# Altium PCB PCB1.PcbDoc
Units mil, origin at the board's own origin, x right, y up, seen from the top; angles counter-clockwise.
Board outline 6000 x 4000 mil, 2 copper layers (Top Layer, Bottom Layer); 40 components, 16 nets, 106 pads, 8 vias.
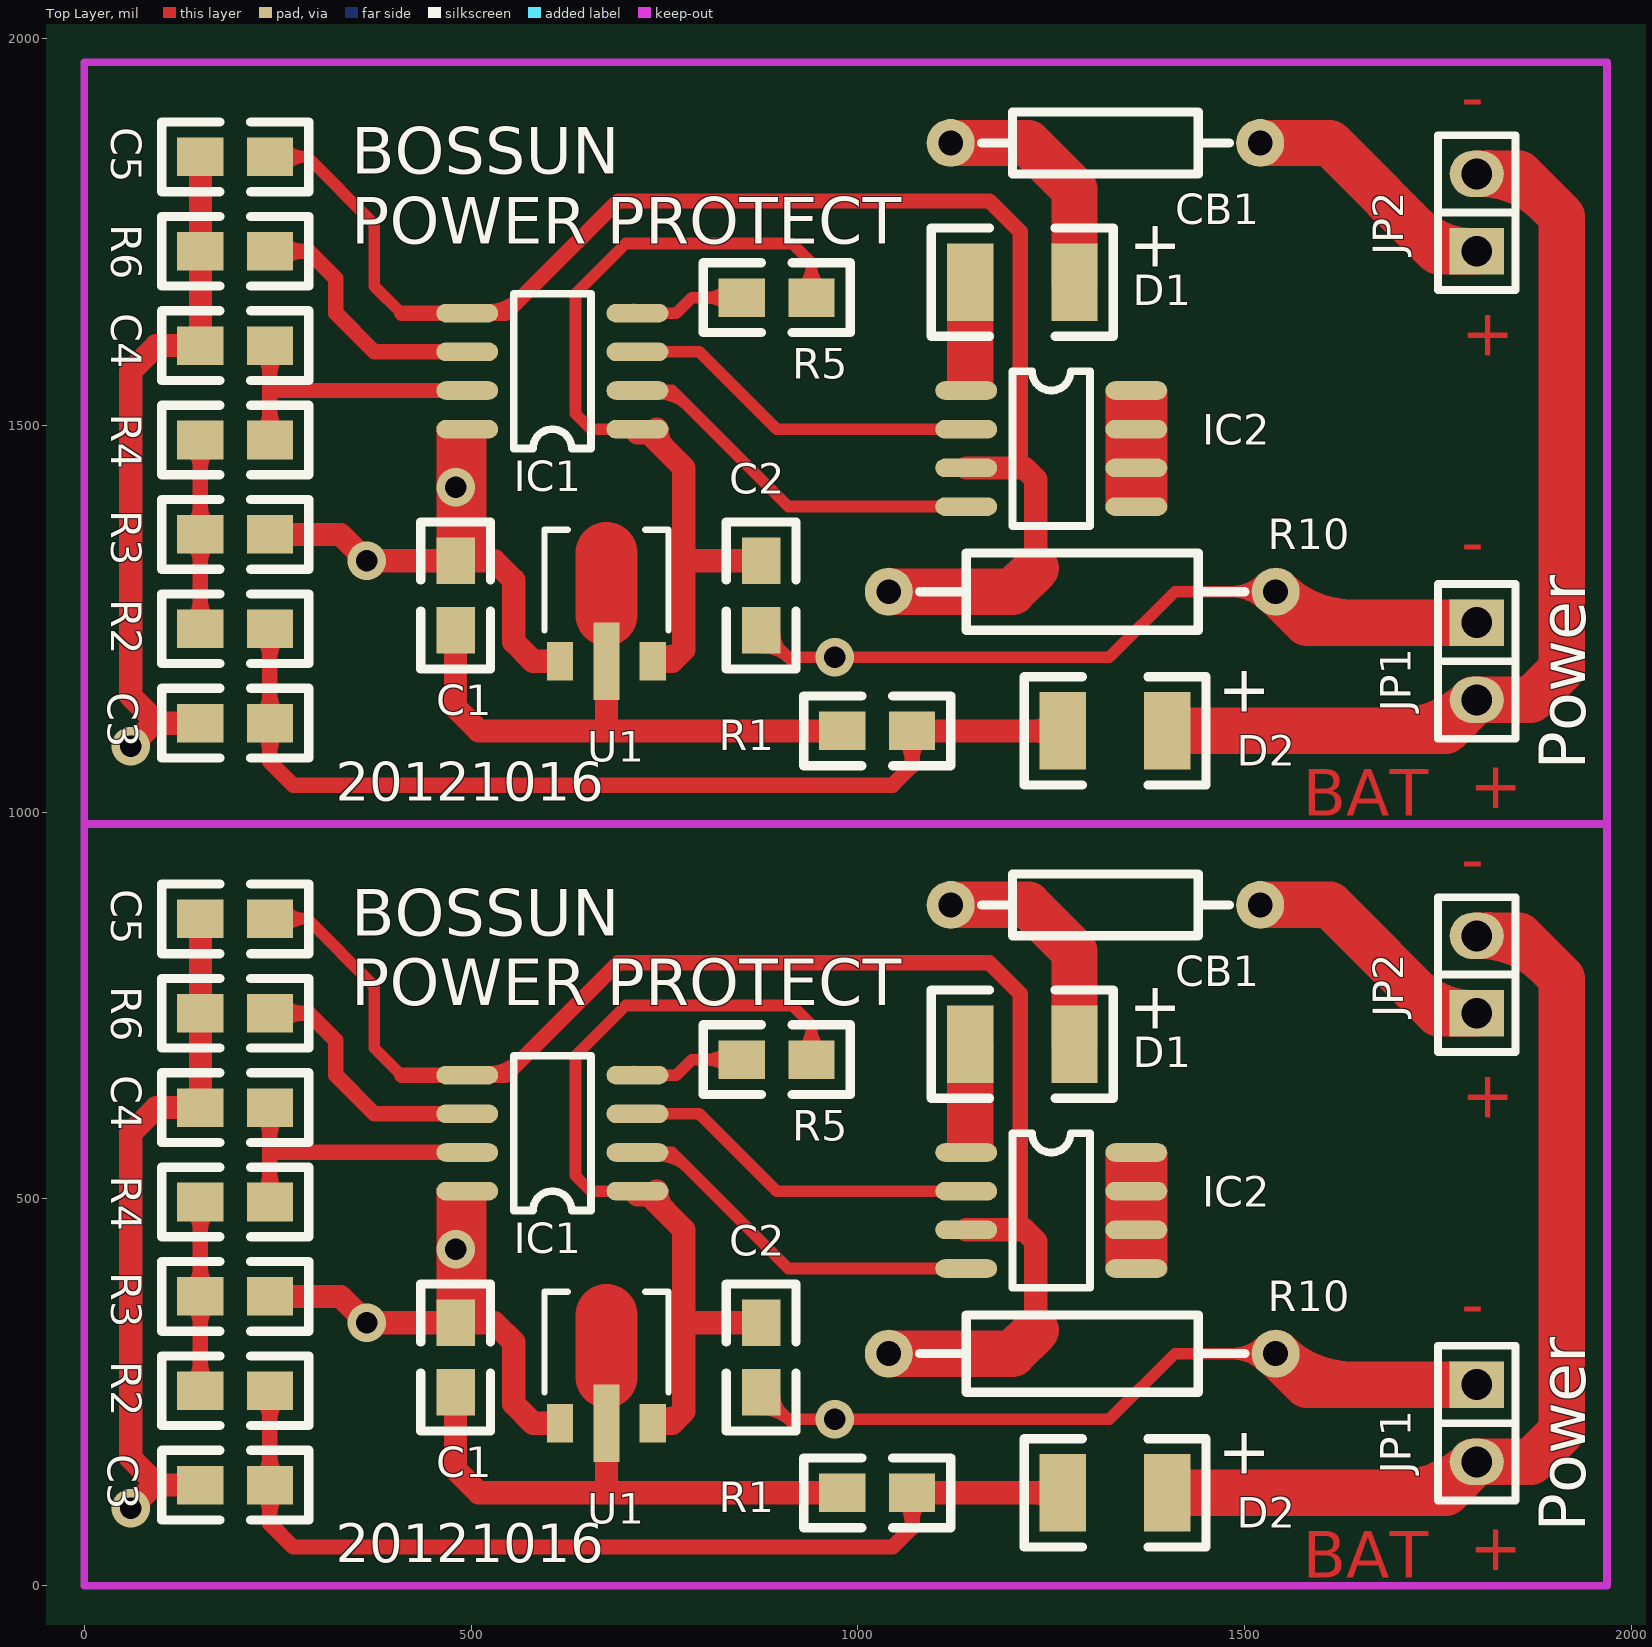
[diagram p0: Top Layer view]
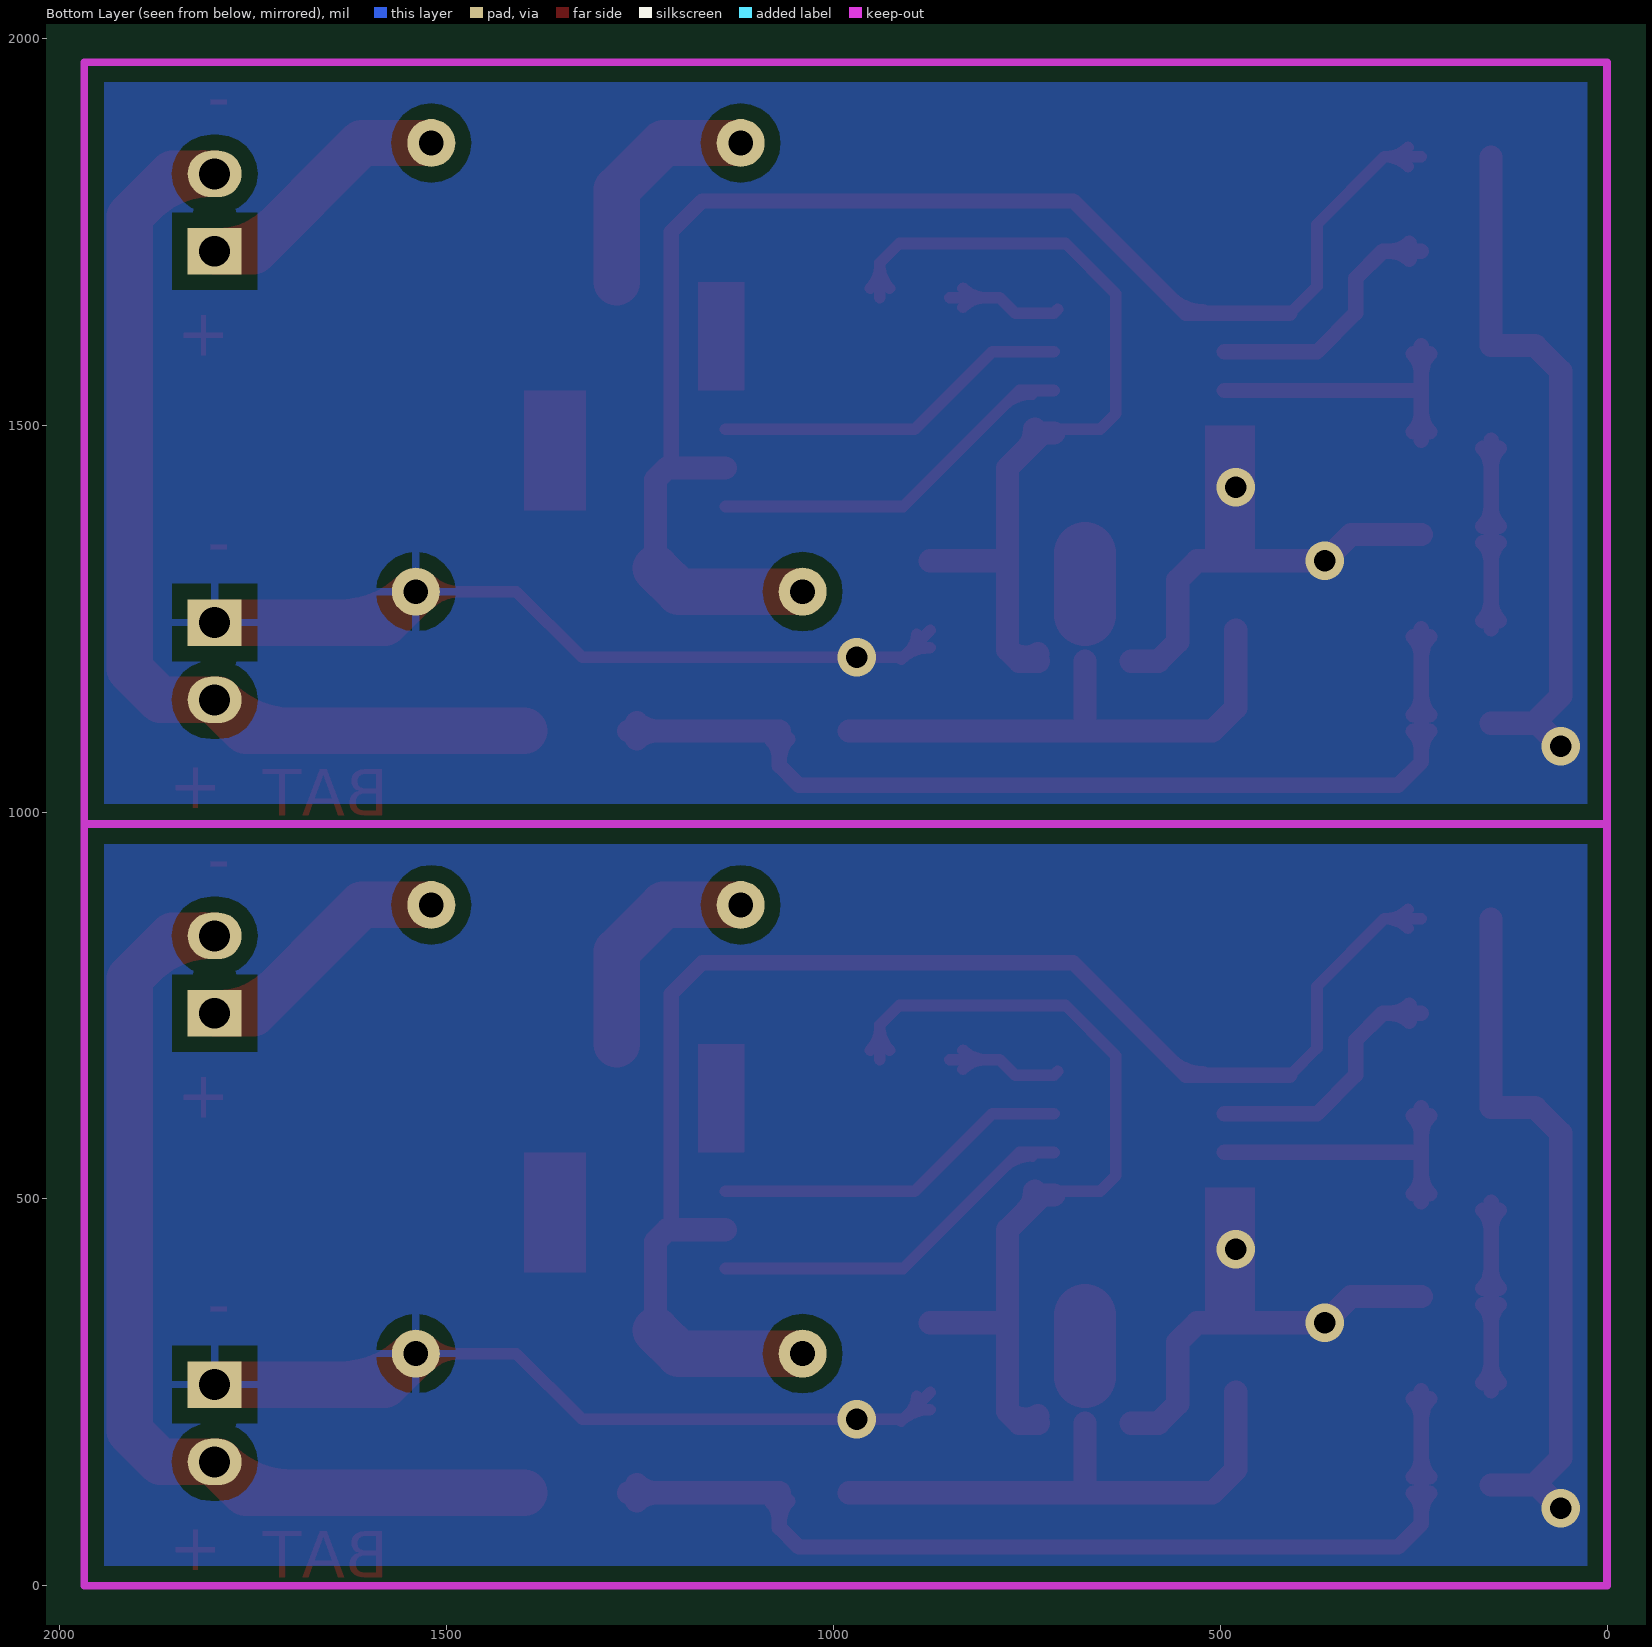
[diagram p1: Bottom Layer view, seen from below]

## Layer stack, top to bottom
Top Layer: signal copper 1.4
Dielectric: dielectric 12.6, FR-4, Dk 4.8
Bottom Layer: signal copper 1.4

## Board outline
-900,-700 5100,-700 5100,3300 -900,3300

## Design rules (kind name [scope] priority, off if disabled: settings)
Clearance Clearance_1 [(InPolygon)] p1: gap=20
Clearance [All] p2: gap=10
ComponentClearance [All] p1: gap=10 collisioncheckmode=0
PolygonConnect [All] p1: connectstyle=Relief reliefconductorwidth=10 reliefentries=4 polygonreliefangle="90 Angle"
RoutingVias [All] p1: holewidth=28 width=50 viastyle="Through Hole" minholewidth=28 minwidth=50 maxholewidth=28 maxwidth=50
SolderMaskExpansion [All] p1: expansion=4
TestPointUsage [All] p1: valid=0 allowmultiple=FALSE
Testpoint [All] p1: side=15 testpointundercomponent=TRUE minsize=40 maxsize=100 preferedsize=60 minholesize=0 maxholesize=40 preferedholesize=32 testpointgrid=1 style=1023 order=-539222988
Width [All] p1: maxlimit=1000 minlimit=10 preferedwidth=10 toplayer_prefwidth=30 minimp=50.000000 maximp=50.000000 favimp=50.000000
17 further rules are at their usual default settings.

## Classes and differential pairs
component class bhdl: C1 C2 C3 C4 C5 CB1 D1 D2 IC1 IC2 JP1 JP2 R1 R2 R3 R4 R5 R6 R10 U1

## Components (designator, comment, footprint, x,y, rotation, side; value= is the part's Value field where it differs from the comment)
C1 "Cap" 0805 480,1325 r270 top
C1 "Cap" 0805 480,340 r270 top
C2 "Cap" 0805 875,1235 r90 top
C2 "Cap" 0805 875,250 r90 top
C3 "Cap" 0805 150,1115 r0 top
C3 "Cap" 0805 150,130 r0 top
C4 "Cap" 0805 150,1603 r0 top
C4 "Cap" 0805 150,618 r0 top
C5 "Cap" 0805 150,1847 r0 top
C5 "Cap" 0805 150,862 r0 top
CB1 "Fuse 2" AXIAL0.4 1120,1865 r0 top
CB1 "Fuse 2" AXIAL0.4 1120,880 r0 top
D1 "SS14" 1210 1280,1685 r180 top
D1 "SS14" 1210 1280,700 r180 top
D2 "1n4148" 1210 1400,1105 r180 top
D2 "1n4148" 1210 1400,120 r180 top
IC1 "PIC12F1822" so-8 715,1495 r180 top
IC1 "PIC12F1822" so-8 715,510 r180 top
IC2 "IRF8910" so-8 1140,1545 r0 top
IC2 "IRF8910" so-8 1140,560 r0 top
JP1 "PW" sip2 1800,1245 r270 top
JP1 "PW" sip2 1800,260 r270 top
JP2 "RL" sip2 1800,1725 r90 top
JP2 "RL" sip2 1800,740 r90 top
R1 "Res2" 0805 980,1105 r0 top
R1 "Res2" 0805 980,120 r0 top
R2 "Res2" 0805 150,1237 r0 top
R2 "Res2" 0805 150,252 r0 top
R3 "Res2" 0805 150,1359 r0 top
R3 "Res2" 0805 150,374 r0 top
R4 "Res2" 0805 150,1481 r0 top
R4 "Res2" 0805 150,496 r0 top
R5 "Res2" 0805 940,1665 r180 top
R5 "Res2" 0805 940,680 r180 top
R6 "100K" 0805 150,1725 r0 top
R6 "100K" 0805 150,740 r0 top
R10 "Res2" AXIAL0.5 1040,1285 r0 top
R10 "Res2" AXIAL0.5 1040,300 r0 top
U1 "ME6201_33" SOT-89 615,1195 r0 top
U1 "ME6201_33" SOT-89 615,210 r0 top

## Footprints (in the part's own frame and the unit in brackets; to place one, negate y for a bottom-side part, rotate by r counter-clockwise, add the part's x,y. Pads: shape width x height; smd on the part's side, far side on the other; paste and mask are expansions set on the pad)
0805 [mil]
  rect 60x50 smd: 1(0,0) 2(90,0)
  silkscreen extent -50,-45 140,45
1210 [mil]
  rect 60x100 smd: 1(0,0) 2(135,0)
  silkscreen extent -50,-70 185,70
AXIAL0.4 [mil]
  round 62 hole 32: 1(0,0) 2(400,0)
  silkscreen extent 40,-40 360,40
AXIAL0.5 [mil]
  round 62 hole 32: 1(0,0) 2(500,0)
  silkscreen extent 40,-50 460,50
sip2 [mil]
  rect 60x70 hole 40: 1(0,0)
  oval 60x70 hole 40: 2(100,0)
  silkscreen extent -50,-50 150,50
so-8 [mil]
  oval 80x24 smd: 1(0,0) 2(0,-50) 3(0,-100) 4(0,-150) 5(220,-150) 6(220,-100) 7(220,-50) 8(220,0)
  silkscreen extent 60,-175 160,25
SOT-89 [mil]
  rect 34x50 smd: 1(0,0) 3(120,0)
  rect 34x100 smd: 2(60,0)
  Top Layer lines w80: 60,60 60,140
  silkscreen extent -20,40 140,170

## Part data
C1 C1 C2 C2 C3 C3 C4 C4 C5 C5: "Capacitor"
CB1 CB1: "Fuse"
D1 D1 D2 D2: library part "Diode 1N4007", "1 Amp General Purpose Rectifier"
IC1 IC1 IC2 IC2: library part "Header 4X2A", "Header, 4-Pin, Dual row"
JP1 JP1 JP2 JP2: library part "Header 2", "Header, 2-Pin"
R1 R1 R2 R2 R3 R3 R4 R4 R5 R5 R10 R10: "Resistor"
R6 R6: library part Res2, "Resistor"
U1 U1: library part "Header 3", "Header, 3-Pin"

## Via types
v1: diameter 50, hole 28, Top Layer to Bottom Layer, 8 vias

## Nets (pads, with @x,y where several pads share a name; then routed paths per layer and width w, separated by ;. In a path a pad name is that pad's centre, name@x,y a point inside that pad or via, vN(x,y) a via of type N, cw(c..) or ccw(c..) an arc to the next point about the centre after c; other vN are vias at no path point)
GND: C1.1@480,340 C2.1@875,250 C3.1@150,130 C4.1@150,618 C5.1@150,862 IC1.8@495,510 JP1.1@1800,260 R3.2@240,374 R6.1@150,740 R10.2@1540,300 U1.1@615,210 | length 2663.8
  Top Layer w15: C2.1@875,250 910,215 1325,215 1410,300 R10.2@1540,300 ; C2.1@875.32,227.5 cw(c876.26,176.26) 912.5,212.5 ; C2.1@892.5,245 ccw(c922.68,245) 901.34,223.66 ; R10.2@1523.38,283.38 ccw(c1483.27,243.27) 1483.27,300 ccw(c1483.27,356.73) R10.2@1523.38,316.62
  Top Layer w30: v1(60,100) 90,130 C3.1@150,130 ; 95,130 60,165 60,585 93,618 150,618 C5.1@150,862 ; R3.2@240,374 331,374 v1(365,340) 530,340 555,315 555,235 580,210 U1.1@615,210
  Top Layer w60: R10.2@1540,300 1580,260 JP1.1@1800,260 ; R10.2@1540.71,300.71 ccw(c1638.98,398.98) 1638.98,260
  other v1: 970,215 480,435
NetC1_2: C1.2@480,250 R1.1@980,120 U1.2@675,210 | length 702.4
  Top Layer w30: C1.2@480,250 480,150 510,120 R1.1@980,120 ; 675,120 U1.2@675,210
NetC2_2: C2.2@875,340 IC1.1@715,510 R5.1@940,680 U1.3@735,210 | length 1227.5
  Top Layer w15: IC1.1@715,510 655,510 635,530 635,685 700,750 915,750 940,725 R5.1@940,680 ; R5.1@927.63,692.37 ccw(c897.75,722.25) 940,722.25 ccw(c982.25,722.25) R5.1@952.37,692.37
  Top Layer w30: IC1.1@715,505 730,505 775,460 775,225 ; U1.3@735,210 760,210 775,225 ; U1.3@735.99,219.74 ccw(c752.04,247.95) 775,225 ; IC1.1@740,510 ccw(c776.21,510) 750.61,484.39 ; 775,340 C2.2@875,340
NetC3_2: C3.2@240,130 D2.2@1265,120 R1.2@1070,120 R2.2@240,252 | length 1549.2
  Top Layer w20: C3.2@229.39,119.39 cw(c203.79,93.79) 240,93.79 cw(c276.21,93.79) C3.2@250.61,119.39 ; C3.2@229.39,140.61 ccw(c203.79,166.21) 240,166.21 ccw(c276.21,166.21) C3.2@250.61,140.61 ; R2.2@229.39,241.39 cw(c203.79,215.79) 240,215.79 cw(c276.21,215.79) R2.2@250.61,241.39 ; R2.2@240,252 240,80 270,50 1045,50 1070,75 R1.2@1070,120 ; R1.2@1059.39,109.39 cw(c1033.79,83.79) 1070,83.79 cw(c1106.21,83.79) R1.2@1080.61,109.39
  Top Layer w30: R1.2@1070,120 D2.2@1265,120 ; D2.2@1254.39,109.39 ccw(c1228.79,83.79) 1228.79,120 ccw(c1228.79,156.21) D2.2@1254.39,130.61
NetC4_2: C4.2@240,618 IC1.7@495,560 R4.2@240,496 | length 490.8
  Top Layer w20: R4.2@229.39,506.61 ccw(c203.79,532.21) 240,532.21 ccw(c276.21,532.21) R4.2@250.61,506.61 ; C4.2@229.39,607.39 cw(c203.79,581.79) 240,581.79 cw(c276.21,581.79) C4.2@250.61,607.39 ; R4.2@240,496 C4.2@240,618 ; 240,560 IC1.7@495,560
NetC5_2: C5.2@240,862 IC1.5@495,660 IC2.3@1140,460 R10.1@1040,300 | length 2013.9
  Top Layer w15: C5.2@240,862 288,862 375,775 375,695 410,660 ; C5.2@257.37,849.63 cw(c287.25,819.75) 287.25,862 cw(c287.25,904.25) C5.2@257.37,874.37 ; 1195,460 1210,475
  Top Layer w20: 410,660 545,660 690,805 1170,805 1210,765 1210,475 ; IC1.5@523,662 ccw(c523,719.94) 563.97,678.97
  Top Layer w30: IC2.3@1140,460 1215,460 1230,445 1230,330
  Top Layer w60: R10.1@1040,300 1200,300 1230,330
NetCB1_1: CB1.1@1120,880 D1.1@1280,700 | length 304.9
  Top Layer w60: CB1.1@1120,880 1220,880 1280,820 D1.1@1280,700
NetCB1_2: CB1.2@1520,880 JP2.1@1800,740 | length 423.3
  Top Layer w60: CB1.2@1520,880 1610,880 1750,740 JP2.1@1800,740 ; 1718.18,771.82 ccw(c1795,848.64) JP2.1@1795,740
NetD1_2: D1.2@1145,700 IC2.1@1140,560
NetD2_1: D2.1@1400,120 JP1.2@1800,160 JP2.2@1800,840 | length 1544.9
  Top Layer w60: D2.1@1400,120 1760,120 1800,160 1870,160 1910,200 1910,785 1855,840 JP2.2@1800,840 ; 1698.43,120 ccw(c1698.43,256.57) JP1.2@1795,160 ; 1880,815 ccw(c1817.5,752.51) 1805,840 cw(c1805,719.29) 1890.36,804.64
NetIC1_2: IC1.2@715,560 IC2.4@1140,410 | length 553.5
  Top Layer w15: IC1.2@715,560 760,560 910,410 IC2.4@1140,410 ; IC1.2@743,555.5 cw(c743,503.59) 779.7,540.3 ; IC1.2@744.83,555.89 cw(c753.47,536.47) 768.5,551.5
NetIC1_3: IC1.3@715,610 IC2.2@1140,510 | length 466.4
  Top Layer w15: IC1.3@715,610 795,610 895,510 IC2.2@1140,510
NetIC1_4: IC1.4@715,660 R5.2@850,680 | length 216.7
  Top Layer w15: IC1.4@710,665 715,660 765,660 785,680 R5.2@850,680 ; R5.2@832.63,667.63 ccw(c802.75,637.75) 802.75,680 ccw(c802.75,722.25) R5.2@832.63,692.37
NetIC1_6: IC1.6@495,610 R6.2@240,740 | length 392.1
  Top Layer w20: R6.2@240,740 290,740 325,705 325,660 375,610 IC1.6@495,610 ; R6.2@255.61,729.39 cw(c281.21,703.79) 281.21,740 cw(c281.21,776.21) R6.2@255.61,750.61
NetIC2_5: IC2.5@1360,410 IC2.6@1360,460 IC2.7@1360,510 IC2.8@1360,560
NetR2_1: R2.1@150,252 R3.1@150,374 R4.1@150,496 | length 471.5
  Top Layer w20: R2.1@139.39,262.61 ccw(c113.79,288.21) 150,288.21 ccw(c186.21,288.21) R2.1@160.61,262.61 ; R3.1@139.39,363.39 cw(c113.79,337.79) 150,337.79 cw(c186.21,337.79) R3.1@160.61,363.39 ; R3.1@139.39,384.61 ccw(c113.79,410.21) 150,410.21 ccw(c186.21,410.21) R3.1@160.61,384.61 ; R4.1@139.39,485.39 cw(c113.79,459.79) 150,459.79 cw(c186.21,459.79) R4.1@160.61,485.39 ; R2.1@150,252 R4.1@150,496
pads on no net: C1.1@480,1325 C1.2@480,1235 C2.1@875,1235 C2.2@875,1325 C3.1@150,1115 C3.2@240,1115 C4.1@150,1603 C4.2@240,1603 C5.1@150,1847 C5.2@240,1847 CB1.1@1120,1865 CB1.2@1520,1865 D1.1@1280,1685 D1.2@1145,1685 D2.1@1400,1105 D2.2@1265,1105 IC1.1@715,1495 IC1.2@715,1545 IC1.3@715,1595 IC1.4@715,1645 IC1.5@495,1645 IC1.6@495,1595 IC1.7@495,1545 IC1.8@495,1495 IC2.1@1140,1545 IC2.2@1140,1495 IC2.3@1140,1445 IC2.4@1140,1395 IC2.5@1360,1395 IC2.6@1360,1445 IC2.7@1360,1495 IC2.8@1360,1545 JP1.1@1800,1245 JP1.2@1800,1145 JP2.1@1800,1725 JP2.2@1800,1825 R1.1@980,1105 R1.2@1070,1105 R2.1@150,1237 R2.2@240,1237 R3.1@150,1359 R3.2@240,1359 R4.1@150,1481 R4.2@240,1481 R5.1@940,1665 R5.2@850,1665 R6.1@150,1725 R6.2@240,1725 R10.1@1040,1285 R10.2@1540,1285 U1.1@615,1195 U1.2@675,1195 U1.3@735,1195
copper on no net: | length 13021
  Top Layer w15: 240,1847 288,1847 375,1760 375,1680 410,1645 ; 257.37,1834.63 cw(c287.25,1804.75) 287.25,1847 cw(c287.25,1889.25) 257.37,1859.37 ; 710,1650 715,1645 765,1645 785,1665 850,1665 ; 715,1495 655,1495 635,1515 635,1670 700,1735 915,1735 940,1710 940,1665 ; 715,1545 760,1545 910,1395 1140,1395 ; 715,1595 795,1595 895,1495 1140,1495 ; 743,1540.5 cw(c743,1488.59) 779.7,1525.3 ; 744.83,1540.89 cw(c753.47,1521.47) 768.5,1536.5 ; 832.63,1652.63 ccw(c802.75,1622.75) 802.75,1665 ccw(c802.75,1707.25) 832.63,1677.37 ; 875,1235 910,1200 1325,1200 1410,1285 1540,1285 ; 875.32,1212.5 cw(c876.26,1161.26) 912.5,1197.5 ; 892.5,1230 ccw(c922.68,1230) 901.34,1208.66 ; 927.63,1677.37 ccw(c897.75,1707.25) 940,1707.25 ccw(c982.25,1707.25) 952.37,1677.37 ; 1195,1445 1210,1460 ; 1523.38,1268.38 ccw(c1483.27,1228.27) 1483.27,1285 ccw(c1483.27,1341.73) 1523.38,1301.62
  Top Layer w20: 139.39,1247.61 ccw(c113.79,1273.21) 150,1273.21 ccw(c186.21,1273.21) 160.61,1247.61 ; 139.39,1348.39 cw(c113.79,1322.79) 150,1322.79 cw(c186.21,1322.79) 160.61,1348.39 ; 139.39,1369.61 ccw(c113.79,1395.21) 150,1395.21 ccw(c186.21,1395.21) 160.61,1369.61 ; 139.39,1470.39 cw(c113.79,1444.79) 150,1444.79 cw(c186.21,1444.79) 160.61,1470.39 ; 150,1237 150,1481 ; 229.39,1104.39 cw(c203.79,1078.79) 240,1078.79 cw(c276.21,1078.79) 250.61,1104.39 ; 229.39,1125.61 ccw(c203.79,1151.21) 240,1151.21 ccw(c276.21,1151.21) 250.61,1125.61 ; 229.39,1226.39 cw(c203.79,1200.79) 240,1200.79 cw(c276.21,1200.79) 250.61,1226.39 ; 229.39,1491.61 ccw(c203.79,1517.21) 240,1517.21 ccw(c276.21,1517.21) 250.61,1491.61 ; 229.39,1592.39 cw(c203.79,1566.79) 240,1566.79 cw(c276.21,1566.79) 250.61,1592.39 ; 240,1237 240,1065 270,1035 1045,1035 1070,1060 1070,1105 ; 240,1481 240,1603 ; 240,1545 495,1545 ; 240,1725 290,1725 325,1690 325,1645 375,1595 495,1595 ; 255.61,1714.39 cw(c281.21,1688.79) 281.21,1725 cw(c281.21,1761.21) 255.61,1735.61 ; 410,1645 545,1645 690,1790 1170,1790 1210,1750 1210,1460 ; 523,1647 ccw(c523,1704.94) 563.97,1663.97 ; 1059.39,1094.39 cw(c1033.79,1068.79) 1070,1068.79 cw(c1106.21,1068.79) 1080.61,1094.39
  Top Layer w30: v1(60,1085) 90,1115 150,1115 ; 95,1115 60,1150 60,1570 93,1603 150,1603 150,1847 ; 240,1359 331,1359 v1(365,1325) 530,1325 555,1300 555,1220 580,1195 615,1195 ; 480,1235 480,1135 510,1105 980,1105 ; 675,1105 675,1195 ; 715,1490 730,1490 775,1445 775,1210 ; 735,1195 760,1195 775,1210 ; 735.99,1204.74 ccw(c752.04,1232.95) 775,1210 ; 740,1495 ccw(c776.21,1495) 750.61,1469.39 ; 775,1325 875,1325 ; 1070,1105 1265,1105 ; 1140,1445 1215,1445 1230,1430 1230,1315 ; 1254.39,1094.39 ccw(c1228.79,1068.79) 1228.79,1105 ccw(c1228.79,1141.21) 1254.39,1115.61
  Top Layer w60: 1040,1285 1200,1285 1230,1315 ; 1120,1865 1220,1865 1280,1805 1280,1685 ; 1400,1105 1760,1105 1800,1145 1870,1145 1910,1185 1910,1770 1855,1825 1800,1825 ; 1520,1865 1610,1865 1750,1725 1800,1725 ; 1540,1285 1580,1245 1800,1245 ; 1540.71,1285.71 ccw(c1638.98,1383.98) 1638.98,1245 ; 1698.43,1105 ccw(c1698.43,1241.57) 1795,1145 ; 1718.18,1756.82 ccw(c1795,1833.64) 1795,1725 ; 1880,1800 ccw(c1817.5,1737.51) 1805,1825 cw(c1805,1704.29) 1890.36,1789.64
  other v1: 970,1200 480,1420

## Polygon pours and split planes (outlines as drawn)
no net on Bottom Layer (solid): 0,985 1965,985 1965,1970 0,1970
GND on Bottom Layer (solid): 0,0 1965,0 1965,985 0,985

## Keep-outs
Keep-Out Layer:
  lines w10: 0,0 1968.5,0 1968.5,984.25 0,984.25 0,0 ; 0,985 0,1969.25 1968.5,1969.25 1968.5,985 0,985

## Other copper
Top Layer:
  rectangle: 455,1340 520,1500
  rectangle: 1115,1545 1175,1685
  rectangle: 1320,1390 1400,1545
  rectangle net NetIC2_5: 1320,405 1400,560
  rectangle net NetD1_2: 1115,560 1175,700
  rectangle net GND: 455,355 520,515
  text "-" at 1780,1895 h60
  text "+" at 1780,1590 h60
  text "-" at 1780,1320 h60
  text "+" at 1790,1005 h60
  text "BAT" at 1575,995 h60
  text "-" at 1780,910 h60
  text "+" at 1780,605 h60
  text "-" at 1780,335 h60
  text "+" at 1790,20 h60
  text "BAT" at 1575,10 h60

## Silkscreen, mask and mechanical layers (free items; w line width, h text height)
Top Overlay:
  text "BOSSUN" at 345,1825 h60
  text "POWER PROTECT" at 345,1735 h60
  text "+" at 1350,1705 h60
  text "+" at 1465,1130 h60
  text "Power" at 1940,1055 h60 r90
  text "20121016" at 325,1015 h50
  text "BOSSUN" at 345,840 h60
  text "POWER PROTECT" at 345,750 h60
  text "+" at 1350,720 h60
  text "+" at 1465,145 h60
  text "Power" at 1940,70 h60 r90
  text "20121016" at 325,30 h50